# Altium PCB NEW_PCB.pcbdoc
Units mil, origin at the board's own origin, x right, y up, seen from the top; angles counter-clockwise.
Board outline 2642.5 x 2125 mil, 2 copper layers (Top Layer, Bottom Layer); 7 components, 21 nets, 44 pads, 0 vias.
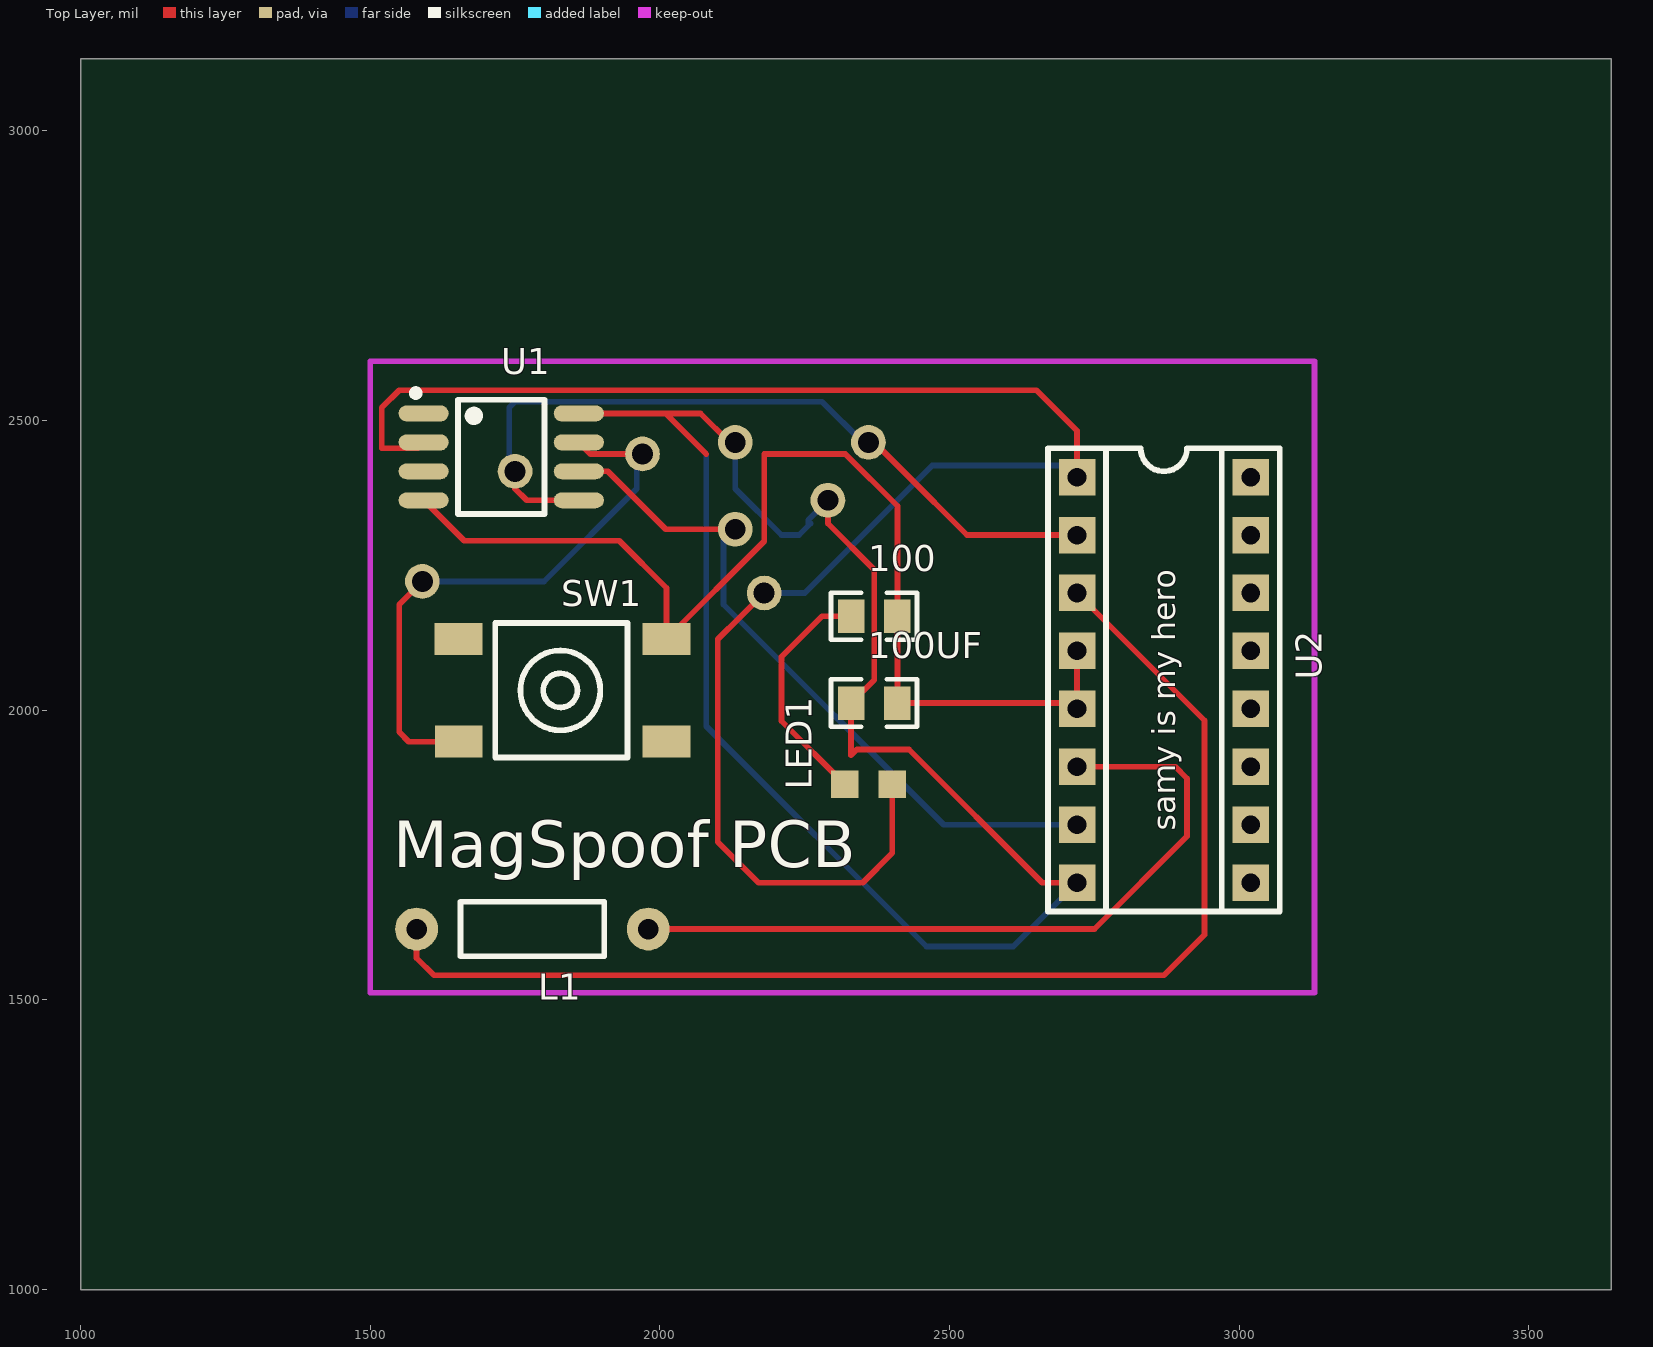
[diagram p0: Top Layer view]
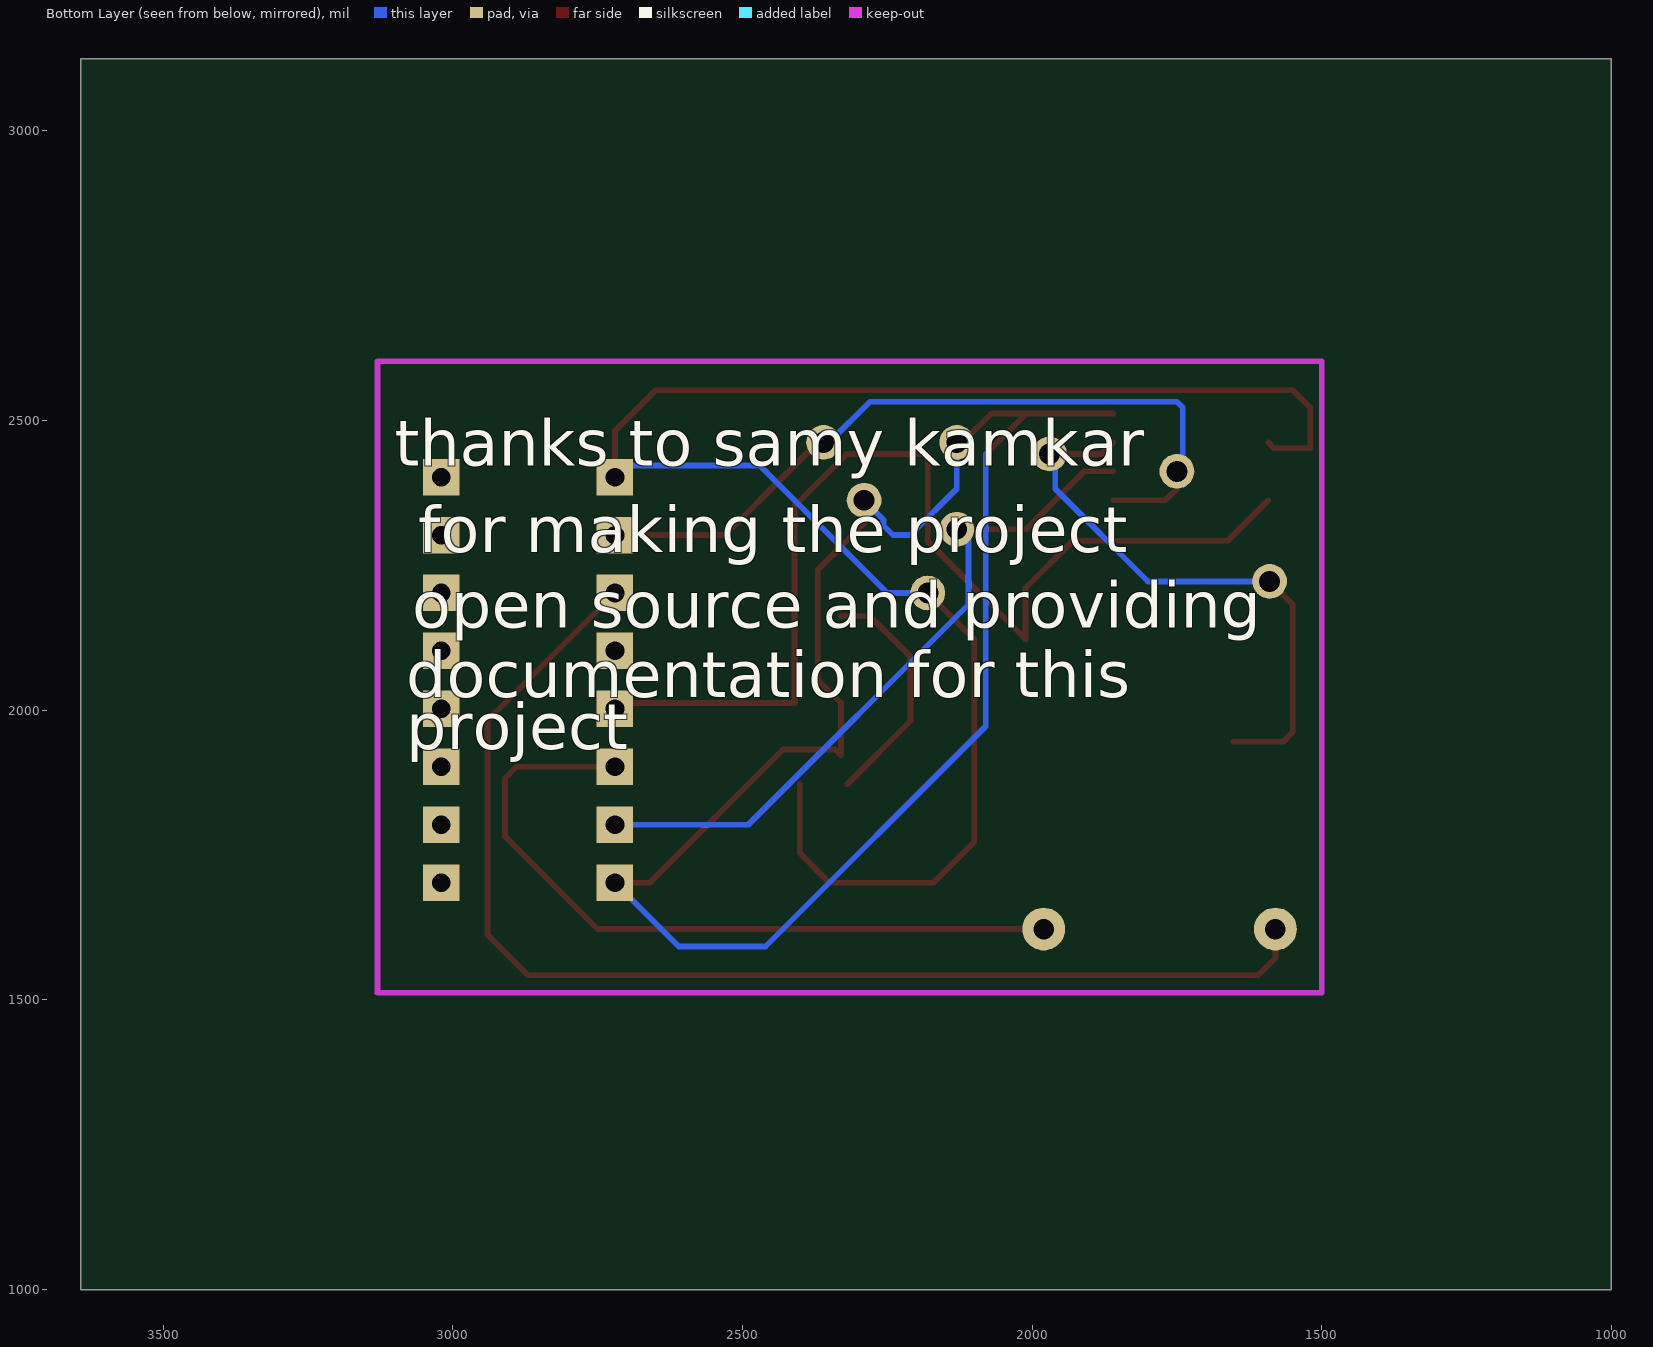
[diagram p1: Bottom Layer view, seen from below]

## Layer stack, top to bottom
Top Layer: signal copper (thickness not stored)
Dielectric: dielectric 12.6, FR-4, Dk 4.8
Bottom Layer: signal copper (thickness not stored)

## Board outline
3642.5,1000 1000,1000 1000,3125 3642.5,3125

## Components (designator, comment, footprint, x,y, rotation, side; value= is the part's Value field where it differs from the comment)
100 "0805 smd res" ?#1 2330,2162.5 r0 top
100UF "CAP0805" ?#1 2330,2012.5 r0 top
L1 "1m" ?#2 1780,1622.5 r180 top
LED1 "LED" ?#3 2360,1872.5 r90 top
SW1 "6*6*12SMD Tactile Switch" ?#4 1830,2032.5 r0 top
U1 "ATTINY85-20SU" ?#5 1860,2362.5 r0 top
U2 "L293D" ?#6 2870,2052.5 r270 top

## Footprints (in the part's own frame and the unit in brackets; to place one, negate y for a bottom-side part, rotate by r counter-clockwise, add the part's x,y. Pads: shape width x height; smd on the part's side, far side on the other; paste and mask are expansions set on the pad)
?#1 [mm]
  rect 1.16x1.47 smd: 1(0,0) 2(2.032,0)
  silkscreen extent -0.88,-1.04 2.89,1.04
?#2 [mm]
  round 1.88 hole 0.899: 1(-5.08,0) 2(5.08,0)
  silkscreen extent -3.15,-1.19 3.15,1.19
?#3 [mm]
  rect 1.199x1.199 smd: A(0,-1.041) C(0,1.041)
?#4 [mm]
  rect 2.1x1.4 smd: 1(4.601,-2.2) 2(-4.502,-2.2) 3(4.604,2.303) 4(-4.503,2.301)
  silkscreen extent -2.9,-2.9 2.9,3
?#5 [mm]
  oval 2.2x0.7 smd: 1(-6.8,3.81) 2(-6.8,2.54) 3(-6.8,1.27) 4(-6.8,0) 5(0,0) 6(0,1.27) 7(0,2.54) 8(0,3.81)
  silkscreen extent -7.3,-0.59 -1.5,4.85
?#6 [mm]
  rect 1.6x1.6 hole 0.813: 1(-8.89,-3.81) 2(-6.35,-3.81) 3(-3.81,-3.81) 4(-1.27,-3.81) 5(1.27,-3.81) 6(3.81,-3.81) 7(6.35,-3.81) 8(8.89,-3.81) 9(8.89,3.81) 10(6.35,3.81) 11(3.81,3.81) 12(1.27,3.81) 13(-1.27,3.81) 14(-3.81,3.81) 15(-6.35,3.81) 16(-8.89,3.81)
  silkscreen extent -10.16,-5.08 10.16,5.08

## Free pads (board coordinates)
  round 60 hole 36: 39(1590,2222.5) 40(1970,2442.5) 41(2180,2202.5) 42(2130,2312.5) 43(2360,2462.5) 44(1750,2412.5) 45(2130,2462.5) 46(2290,2362.5)

## Nets (pads, with @x,y where several pads share a name; then routed paths per layer and width w, separated by ;. In a path a pad name is that pad's centre, name@x,y a point inside that pad or via, vN(x,y) a via of type N, cw(c..) or ccw(c..) an arc to the next point about the centre after c; other vN are vias at no path point)
LED1_C: 100.1 LED1.C | length 414.2
  Top Layer w10: LED1.C 2210,1981.5 2210,2092.5 2279.99,2162.49 100.1
S$308: 100UF.1 pad.45 pad.46 U1.8 U2.8 | length 3131
  Top Layer w10: 2080,2442.5 2010,2512.5 U1.8 2070,2512.5 pad.45@2120,2462.5 ; pad.46 2290,2322.5 2370,2242.5 2370,2052.48 100UF.1 2330,1922.5 2340,1932.5 2430,1932.5 2660,1702.5 U2.8
  Bottom Layer w10: 2080,2442.5 2080,1972.5 2460,1592.5 2610,1592.5 U2.8 ; pad.45 2130,2382.5 2210,2302.5 2240,2302.5 2260,2322.5 ; 2256.17,2318.67 2256.17,2328.67 pad.46
SW1_1: SW1.1
SW1_4: SW1.4
U1_1: U1.1
U1_2: LED1.A pad.41 U1.2 U2.1 | length 3040.5
  Top Layer w10: U1.2 1582.28,2452.5 1520,2452.5 1520,2522.5 1550,2552.5 2650,2552.5 2720,2482.5 U2.1 ; pad.41 2140,2162.5 2100,2122.5 2100,1772.5 2170,1702.5 2350,1702.5 2401,1753.5 LED1.A
  Bottom Layer w10: pad.41 2250,2202.5 2470,2422.5 2700,2422.5 U2.1
U1_3: U1.3
U1_4: 100.2 100UF.2 SW1.3 U1.4 U2.4 U2.5 | length 1980.4
  Top Layer w10: U1.4 1662.28,2292.5 1930,2292.5 2011.26,2211.24 SW1.3 2180,2291.89 2180,2442.5 2320,2442.5 2410.01,2352.49 100.2 100UF.2 2710.01,2012.49 U2.5 U2.4
U1_5: pad.43 pad.44 U1.5 U2.2 | length 1344.3
  Top Layer w10: pad.44 1750,2382.5 1770,2362.5 U1.5 ; pad.43@2370,2462.5 2421.76,2410.74 ; 2420,2412.5 2530,2302.5 U2.2
  Bottom Layer w10: pad.44 1740,2422.5 1740,2462.5 1740,2522.5 1750,2532.5 2280,2532.5 2350,2462.5 pad.43@2370,2462.5
U1_6: pad.42 U1.6 U2.7 | length 1217.1
  Top Layer w10: U1.6 1910,2412.5 2010,2312.5 pad.42
  Bottom Layer w10: pad.42 2110,2292.5 2110,2182.5 2490,1802.5 U2.7
U1_7: pad.39 pad.40 SW1.2 U1.7 | length 1004.9
  Top Layer w10: pad.39 1550,2182.5 1550,1962.5 1566.62,1945.88 SW1.2 ; U1.7 1880,2442.5 pad.40
  Bottom Layer w10: pad.39 1800,2222.5 1960,2382.5 1960,2432.5 pad.40
U2_3: L1.2 U2.3 | length 2132.5
  Top Layer w10: L1.2 1580,1572.5 1610,1542.5 2870,1542.5 2940,1612.5 2940,1982.5 U2.3
U2_6: L1.1 U2.6 | length 1294.6
  Top Layer w10: L1.1 2750,1622.5 2910,1782.5 2910,1882.5 2890,1902.5 U2.6
U2_9: U2.9
U2_10: U2.10
U2_11: U2.11
U2_12: U2.12
U2_13: U2.13
U2_14: U2.14
U2_15: U2.15
U2_16: U2.16

## Silkscreen, mask and mechanical layers (free items; w line width, h text height)
Top Overlay:
  text "samy is my hero" at 2890,1792.5 h40 r90
  text "MagSpoof PCB" at 1540,1728.9 h80
Bottom Overlay:
  text "thanks to samy kamkar" at 3100,2422.5 h80
  text "for making the project" at 3060,2272.5 h80
  text "open source and providing" at 3070,2142.5 h80
  text "documentation for this" at 3080,2022.5 h80
  text "project" at 3080,1932.5 h80